# Altium PCB AutoReverse.PcbDoc
Units mm, origin at the board's own origin, x right, y up, seen from the top; angles counter-clockwise.
Board outline 68.83 x 48.9 mm, 2 copper layers (Top Layer, Bottom Layer); 24 components, 18 nets, 66 pads, 9 vias.
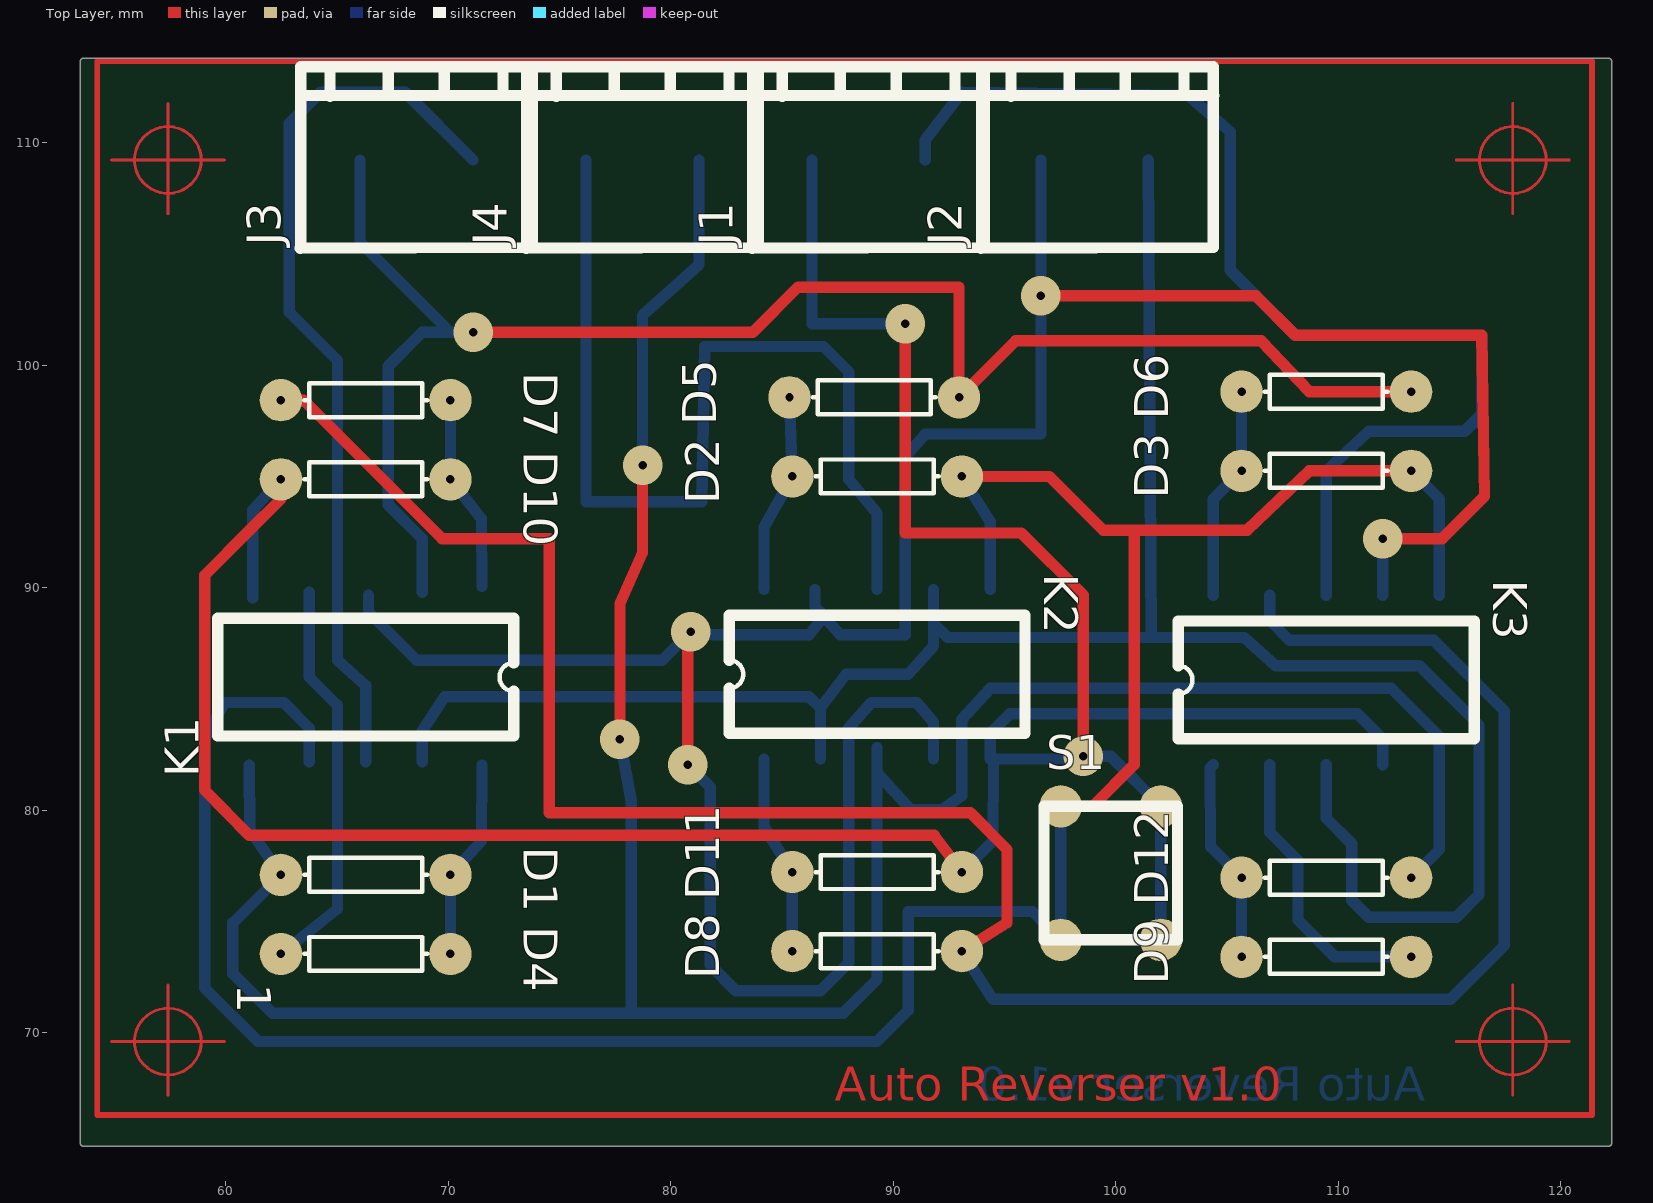
[diagram p0: Top Layer view]
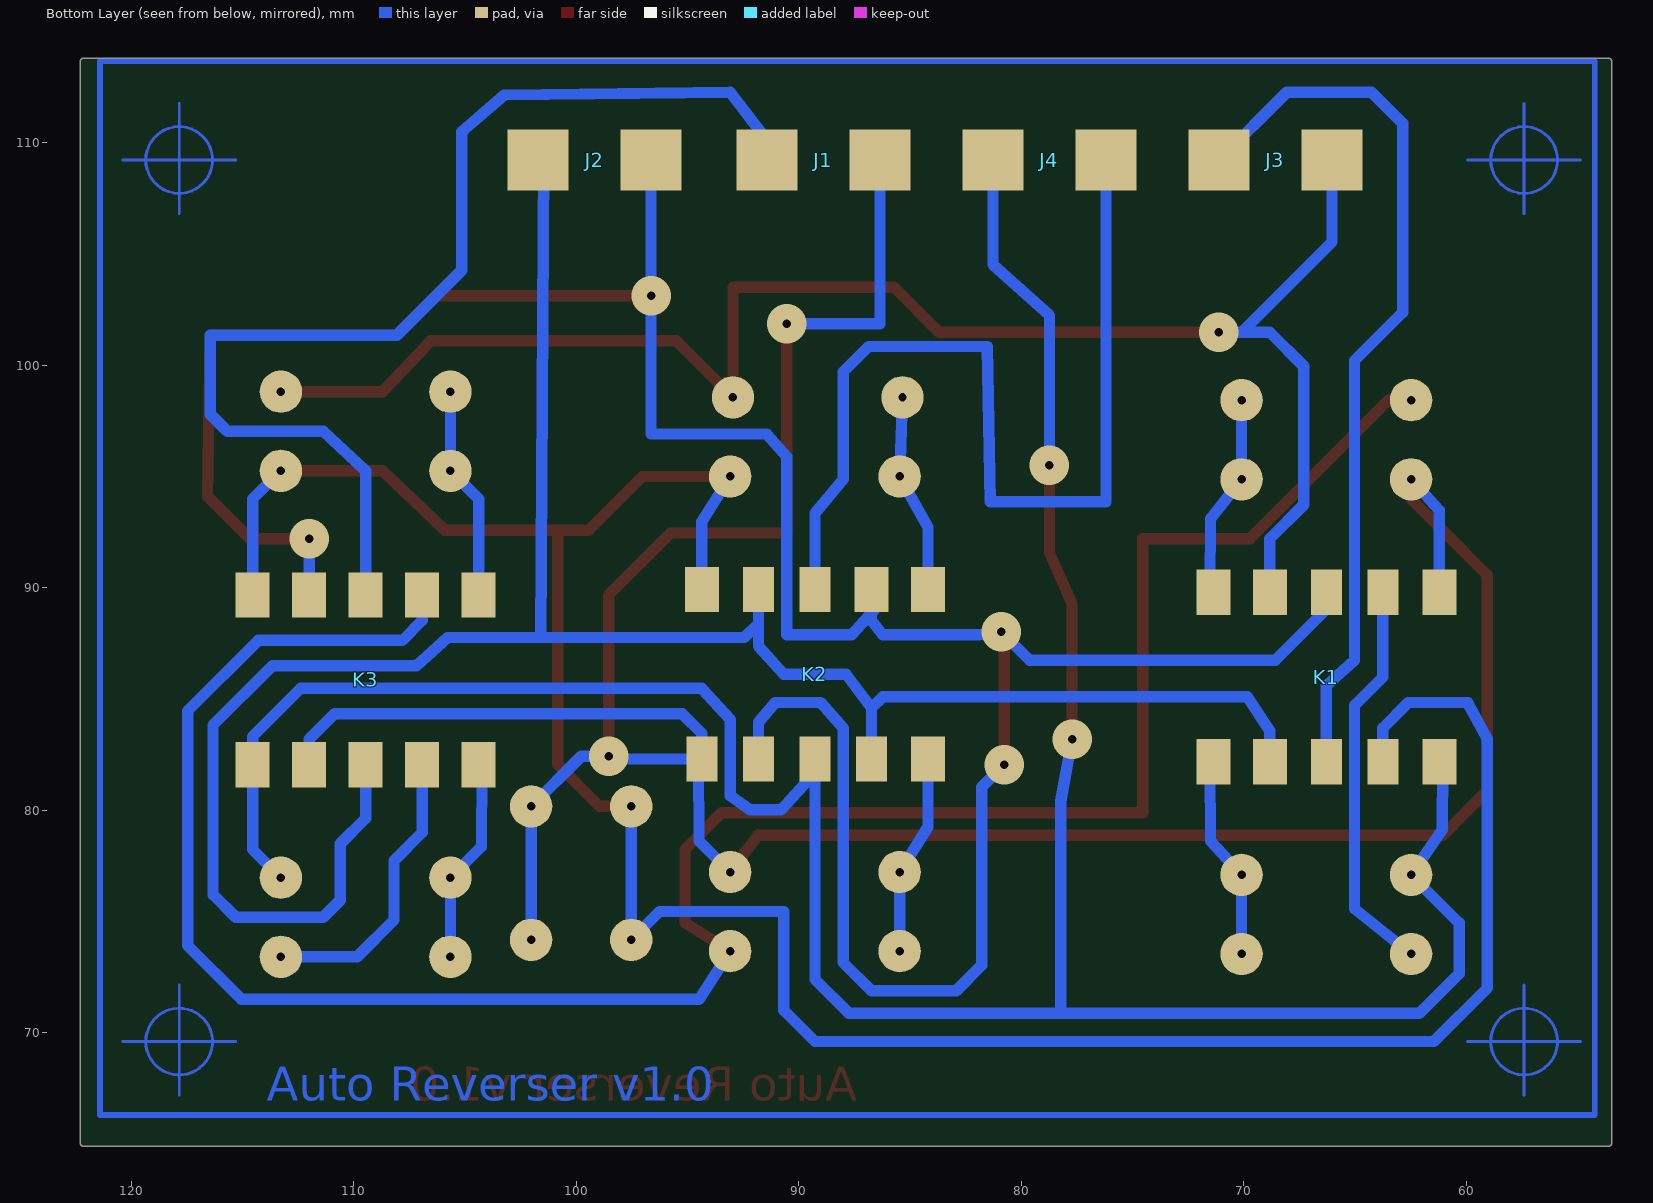
[diagram p1: Bottom Layer view, seen from below]

## Layer stack, top to bottom
Top Layer: signal copper 0.0356
Dielectric: dielectric 0.32, FR-4, Dk 4.8
Bottom Layer: signal copper 0.0356

## Board outline
53.594,64.897 cw(c53.594,65.024) 53.467,65.024 53.467,113.665 cw(c53.594,113.665) 53.594,113.792 122.174,113.792 cw(c122.174,113.665) 122.301,113.665 122.301,65.024 cw(c122.174,65.024) 122.174,64.897

## Design rules (kind name [scope] priority, off if disabled: settings)
Clearance [All] p1: gap=0.305
ComponentClearance [All] p1: gap=0.254 collisioncheckmode=0
PolygonConnect [All] p1: connectstyle=Relief reliefconductorwidth=0.254 reliefentries=4 polygonreliefangle="90 Angle"
RoutingLayers [All] p1: top layer=Horizontal bottom layer=Vertical
RoutingVias [All] p1: holewidth=0.711 width=1.27 viastyle="Through Hole" minholewidth=0.711 minwidth=1.27 maxholewidth=0.711 maxwidth=1.27
SolderMaskExpansion [All] p1: expansion=0.102
TestPointUsage [All] p1: valid=0 allowmultiple=FALSE
Testpoint [All] p1: side=15 testpointundercomponent=TRUE minsize=1.016 maxsize=2.54 preferedsize=1.524 minholesize=0 maxholesize=1.016 preferedholesize=0.813 testpointgrid=0.025 style=1023 order=1234567890
Width [All] p1: maxlimit=1.27 minlimit=0.254 preferedwidth=0.508
16 further rules are at their usual default settings.

## Classes and differential pairs
component class AutoReverse: D1 D2 D3 D4 D5 D6 D7 D8 D9 D10 D11 D12 J1 J2 J3 J4 K1 K2 K3 S1

## Components (designator, comment, footprint, x,y, rotation, side; value= is the part's Value field where it differs from the comment)
1 "" Crosshair 57.404,69.596 r270 top
D1 "Diode 1N4001" AXIAL-0.3 66.294,77.089 r0 top
D2 "Diode 1N4001" AXIAL-0.3 89.281,94.996 r180 top
D3 "Diode 1N4001" AXIAL-0.3 109.474,95.25 r180 top
D4 "Diode 1N4001" AXIAL-0.3 66.294,73.533 r0 top
D5 "Diode 1N4001" AXIAL-0.3 89.154,98.552 r180 top
D6 "Diode 1N4001" AXIAL-0.3 109.474,98.806 r180 top
D7 "Diode 1N4001" AXIAL-0.3 66.294,98.425 r0 top
D8 "Diode 1N4001" AXIAL-0.3 89.281,73.66 r180 top
D9 "Diode 1N4001" AXIAL-0.3 109.474,73.406 r180 top
D10 "Diode 1N4001" AXIAL-0.3 66.294,94.869 r0 top
D11 "Diode 1N4001" AXIAL-0.3 89.281,77.216 r180 top
D12 "Diode 1N4001" AXIAL-0.3 109.474,76.962 r180 top
J1 "East" "Screw Terminal 2 way 0.2" 93.98,111.76 r90 top
J2 "Main Track" "Screw Terminal 2 way 0.2" 104.267,111.76 r90 top
J3 "West" "Screw Terminal 2 way 0.2" 73.66,111.76 r90 top
J4 "Center" "Screw Terminal 2 way 0.2" 83.82,111.76 r90 top
K1 "West Relay" DIP-10#1 66.294,85.979 r180 top
K2 "Reversing Relay" DIP-10#2 89.281,86.106 r0 top
K3 "East Relay" DIP-10#3 109.474,85.852 r0 top
S1 "SPST Micro Pushbutton" "SPST Micro Tactile" 97.536,74.168 r0 top
? "" Crosshair 117.856,69.596 r270 top
? "" Crosshair 117.856,109.22 r270 top
? "" Crosshair 57.404,109.22 r270 top

## Footprints (in the part's own frame and the unit in brackets; to place one, negate y for a bottom-side part, rotate by r counter-clockwise, add the part's x,y. Pads: shape width x height; smd on the part's side, far side on the other; paste and mask are expansions set on the pad)
AXIAL-0.3 [mil]
  round 75 hole 15: 1(-150,0) 2(150,0)
  silkscreen extent -109,-30 109,30
Crosshair [mm] "Mounting Hole pad"
  Multi-Layer circle w0.127: c0,0 r1.5
  Multi-Layer lines w0.127: 0,-2.54 0,2.54 ; 2.413,0 -2.54,0
DIP-10#1 [mil]
  rect 60x80 smd far side: 1(-200,-150) 2(-100,-150) 5(200,-150) 6(200,150) 9(-100,150) 10(-200,150)
  rect 55x80 smd far side: 3(0,-150) 4(100,-150) 7(100,150) 8(0,150)
  silkscreen extent -262,-104 262,104
DIP-10#2 [mil]
  rect 60x80 smd far side: 1(-200,-150) 6(200,150) 9(-100,150) 10(-200,150)
  rect 55x80 smd far side: 2(-100,-150) 3(0,-150) 4(100,-150) 5(200,-150) 7(100,150) 8(0,150)
  silkscreen extent -262,-104 262,104
DIP-10#3 [mil]
  rect 60x80 smd far side: 1(-200,-150) 2(-100,-150) 3(0,-150) 4(100,-150) 5(200,-150) 6(200,150) 7(100,150) 8(0,150) 9(-100,150) 10(-200,150)
  silkscreen extent -262,-104 262,104
"Screw Terminal 2 way 0.2" [mm]
  rect 2.75x2.75 smd far side: 1(-2.54,7.62) 2(-2.54,2.54)
  silkscreen extent -6.5,-0.15 1.65,10.31
"SPST Micro Tactile" [mm]
  round 1.905 hole 0.381: 1a(0,6) 1b(0,0) 2a(4.5,6) 2b(4.5,0)
  silkscreen extent -0.75,0 5.25,6

## Part data
D1 D2 D3 D4 D5 D6 D7 D8 D9 D10 D11 D12: "1 Amp General Purpose Rectifier"
J1 J2 J3 J4: library part "Screw Terminal 2 Way"
K1 K2 K3: library part "EA2-5T Dual Coil 5V Latching Relay", "EA2-5T Dual Coil 5V Latching Relay"

## Via types
v1: diameter 1.778, hole 0.381, Top Layer to Bottom Layer, 9 vias

## Nets (pads, with @x,y where several pads share a name; then routed paths per layer and width w, separated by ;. In a path a pad name is that pad's centre, name@x,y a point inside that pad or via, vN(x,y) a via of type N, cw(c..) or ccw(c..) an arc to the next point about the centre after c; other vN are vias at no path point)
NetD1_1: D1.1 D12.1 J4.2 K1.6 K2.3 K3.5 | length 129.1
  Top Layer w0.508: v1(77.724,83.185) 77.724,89.281 78.74,91.567 v1(78.74,95.504)
  Bottom Layer w0.508: K1.6@61.064,82.019 61.087,79.121 D1.1 60.325,74.93 60.325,72.644 62.103,70.866 87.757,70.866 89.281,72.39 K2.3@89.281,82.804 ; v1(77.724,83.185) 78.232,80.391 78.232,70.993 ; v1(78.74,95.504) 78.74,102.235 81.28,104.521 J4.2 ; K2.3@89.281,81.661 90.805,80.01 92.202,80.01 93.091,80.645 93.091,84.074 94.361,85.471 112.395,85.471 114.554,83.312 114.554,78.232 D12.1
NetD1_2: D1.2 D4.2 K1.10 | length 9
  Bottom Layer w0.508: D4.2 D1.2 71.501,78.613 K1.10@71.524,82.019
NetD2_1: D2.1 D3.1 K1.7 K2.6 K3.6 S1.1a S1.1b | length 118.3
  Top Layer w0.508: D2.1 97.028,94.996 99.441,92.583 105.918,92.583 108.712,95.25 D3.1 ; S1.1a 98.964,80.168 100.838,82.042 100.838,92.583
  Bottom Layer w0.508: K1.7 63.754,83.693 62.611,84.836 59.944,84.836 59.055,83.185 59.055,72.009 61.468,69.596 89.281,69.596 90.678,70.993 90.678,75.438 92.71,75.438 96.266,75.438 S1.1b S1.1a ; D2.1 94.361,92.964 K2.6 ; D3.1 114.554,93.98 K3.6
NetD2_2: D2.2 D5.2 K2.10 | length 9
  Bottom Layer w0.508: K2.10 84.201,92.71 D2.2 D5.2
NetD3_2: D3.2 D6.2 K3.10 | length 9.7
  Bottom Layer w0.508: K3.10 104.394,93.98 D3.2 D6.2
NetD4_1: D4.1 K1.4 | length 18
  Bottom Layer w0.508: D4.1 65.024,75.565 65.024,78.613 65.024,80.899 65.024,84.709 63.754,85.979 K1.4
NetD5_1: D5.1 D6.1 J3.1 K1.2 | length 75.7
  Top Layer w0.508: v1(71.12,101.473) 83.693,101.473 85.725,103.505 92.964,103.505 D5.1 95.504,101.092 106.553,101.092 108.712,98.806 D6.1
  Bottom Layer w0.508: J3.1 66.04,105.537 70.104,101.473 v1(71.12,101.473) 68.834,101.473 67.31,99.949 67.31,93.726 68.834,92.202 K1.2
NetD7_1: D7.1 D8.1 K3.9 | length 104.4
  Top Layer w0.508: D7.1 63.5,98.425 69.723,92.202 74.549,92.202 74.549,79.883 93.472,79.883 95.123,78.232 95.123,74.93 D8.1
  Bottom Layer w0.508: D8.1 94.488,71.501 115.062,71.501 117.475,73.914 117.475,84.455 114.3,87.63 107.823,87.63 106.934,88.519 K3.9
NetD7_2: D7.2 D10.2 K1.1 | length 8.8
  Bottom Layer w0.508: D7.2 D10.2 71.501,93.091 K1.1@71.524,90.066
NetD8_2: D8.2 D11.2 K2.1 | length 9
  Bottom Layer w0.508: K2.1 84.201,79.248 D11.2 D8.2
NetD9_1: D9.1 K3.2 | length 13.3
  Bottom Layer w0.508: K3.2 106.934,78.994 108.204,77.724 108.204,75.057 109.855,73.406 D9.1
NetD9_2: D9.2 D12.2 K3.1 | length 9.3
  Bottom Layer w0.508: K3.1 104.244,81.892 104.267,78.359 D12.2 D9.2
NetD10_1: D10.1 D11.1 J1.1 K1.5 K2.5 K3.4 S1.2a S1.2b | length 135.2
  Top Layer w0.508: D10.1 62.484,93.98 61.064,92.56 59.055,90.551 59.055,80.899 61.064,78.867 91.844,78.867 D11.1 ; v1(90.551,101.854) 90.551,92.456 95.758,92.456 98.552,89.662 v1(98.552,82.423)
  Bottom Layer w0.508: K1.5@61.214,89.535 61.214,93.472 D10.1 ; J1.1 86.36,101.854 v1(90.551,101.854) ; D11.1 94.488,78.613 K2.5@94.511,82.146 ; S1.2b S1.2a 99.781,82.423 v1(98.552,82.423) 98.425,82.296 K2.5 94.361,83.439 95.25,84.328 110.871,84.328 112.014,83.185 K3.4
NetJ1_2: J1.2 K3.8 | length 52.2
  Bottom Layer w0.508: J1.2 91.44,110.109 93.091,112.268 103.251,112.141 105.156,110.49 105.156,104.267 108.077,101.346 116.459,101.346 116.459,97.79 115.697,97.028 111.379,97.028 109.474,95.25 K3.8
NetJ2_1: J2.1 K1.3 K2.4 K2.9 K3.7 | length 130.8
  Top Layer w0.508: v1(80.772,82.042) 80.772,87.884 v1(80.899,88.011) ; v1(96.647,103.124) 106.309,103.114 108.077,101.346 115.062,101.346 116.459,101.346 116.586,94.107 114.681,92.202 v1(112.014,92.202)
  Bottom Layer w0.508: K1.3@66.421,89.662 66.421,88.9 68.58,86.741 79.629,86.741 v1(80.899,88.011) 81.915,87.884 86.233,87.884 86.741,88.519 K2.9@86.741,88.9 ; v1(80.772,82.042) 81.788,81.026 81.788,73.025 82.931,71.882 86.741,71.882 88.011,73.152 88.011,83.693 89.027,84.836 91.059,84.836 91.821,83.947 K2.4 ; K2.9@86.487,89.916 86.487,89.154 87.63,87.884 90.551,87.884 90.551,88.9 90.551,90.805 90.551,95.885 91.44,96.901 96.647,96.901 v1(96.647,103.124) J2.1 ; K3.7 v1(112.014,92.202)
NetJ2_2: J2.2 K1.9 K2.2 K2.7 K3.3 | length 102.6
  Bottom Layer w0.508: K1.9 68.834,83.566 69.85,85.09 86.233,85.09 86.741,84.582 ; 91.821,88.646 91.821,87.376 90.678,86.106 87.884,86.106 86.741,84.582 ; K2.7 91.821,88.392 92.456,87.757 105.791,87.757 107.188,86.487 113.665,86.487 116.332,83.82 116.332,76.2 115.316,75.184 111.379,75.184 110.617,75.946 110.617,78.486 109.474,79.629 K3.3 ; J2.2@101.473,109.22 101.6,87.757 ; 86.741,84.582 K2.2 86.741,84.582
NetJ3_2: J3.2 K1.8 | length 40.3
  Bottom Layer w0.508: K1.8 66.294,85.598 65.024,86.741 65.024,100.203 62.865,102.362 62.865,110.871 64.262,112.268 68.072,112.268 J3.2
NetJ4_1: J4.1 K2.8 | length 44.7
  Bottom Layer w0.508: J4.1 76.2,93.853 81.407,93.853 81.534,100.838 86.868,100.838 88.011,99.695 88.011,94.869 89.281,93.345 K2.8
copper on no net: | length 191.9
  Bottom Layer w0.254: 43.815,49.911 44.323,48.387 ; 43.815,146.863 44.323,148.387 ; 44.069,48.387 44.577,48.387 ; 44.069,148.387 44.577,148.387 ; 44.323,92.648 44.323,48.387 ; 44.323,104.126 44.323,148.387 ; 44.831,49.911 44.323,48.387 ; 44.831,146.863 44.323,148.387 ; 47.879,124.333 47.879,124.841 ; 49.403,124.079 47.879,124.587 ; 49.403,125.095 47.879,124.587 ; 92.14,124.587 47.879,124.587 ; 103.618,124.587 147.879,124.587 ; 146.355,124.079 147.879,124.587 ; 146.355,125.095 147.879,124.587 ; 147.879,124.333 147.879,124.841

## Other copper
Top Layer:
  text "Auto Reverser v1.0" at 87.376,66.929 h1.52
Bottom Layer:
  text "100 (mm)" at 92.394,123.673 h1.52
  text "100 (mm)" at 45.237,92.902 h1.52 r90
  text "Auto Reverser v1.0" at 113.919,66.929 h1.52
Multi-Layer:
  lines w0.254: 54.229,66.294 121.412,66.294 121.412,113.665 54.229,113.665 54.229,66.294